# EAGLE board burglar alarm (EAGLE 6.1)
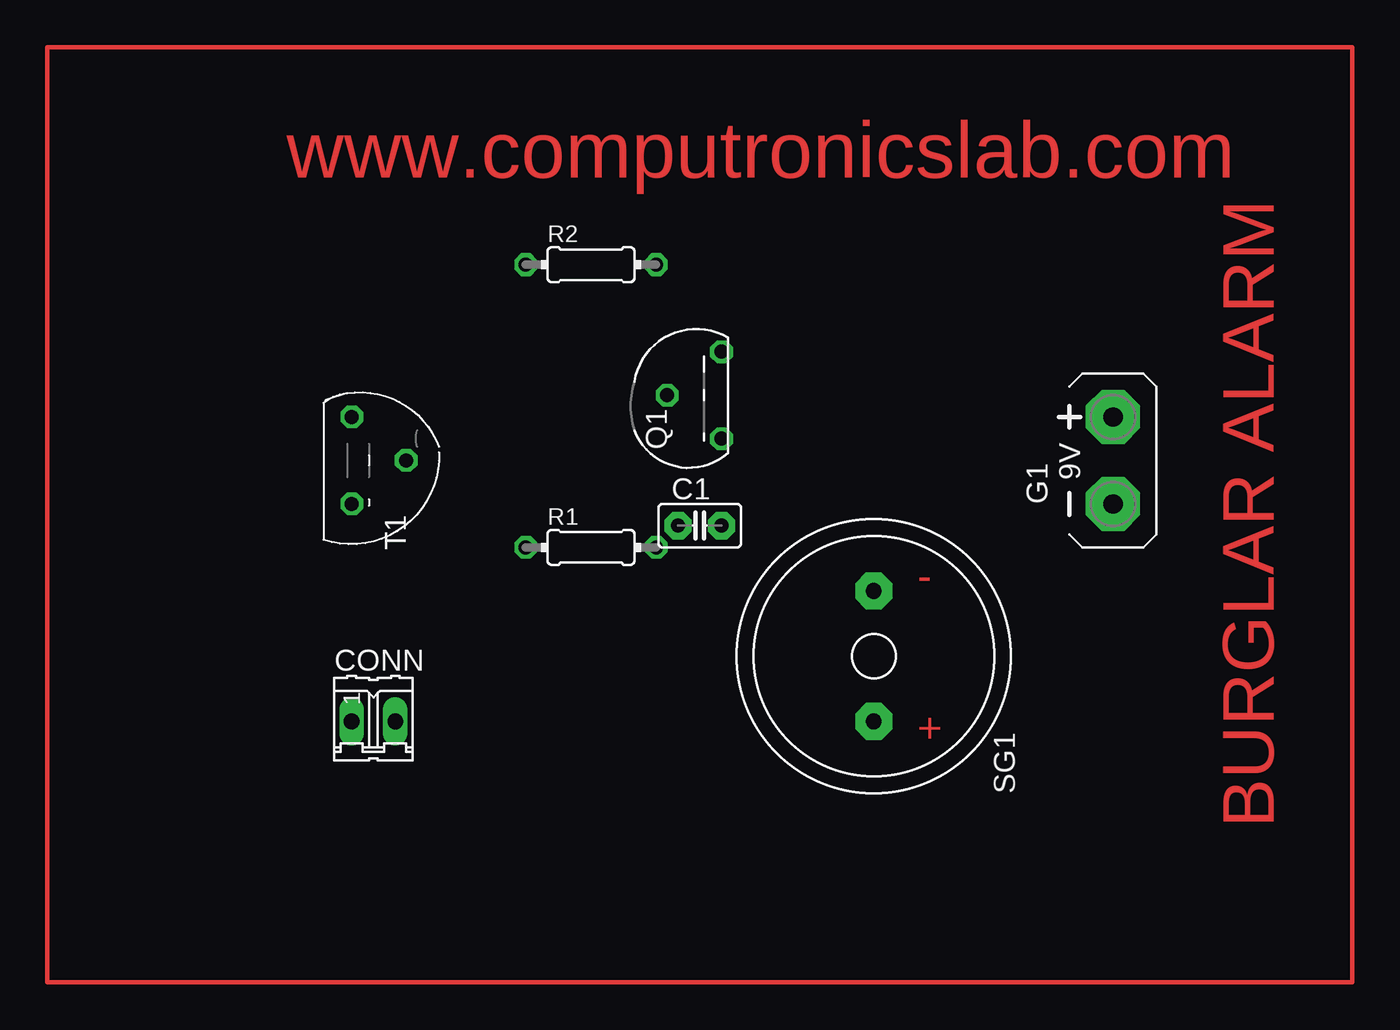
[diagram p0: board, top side]
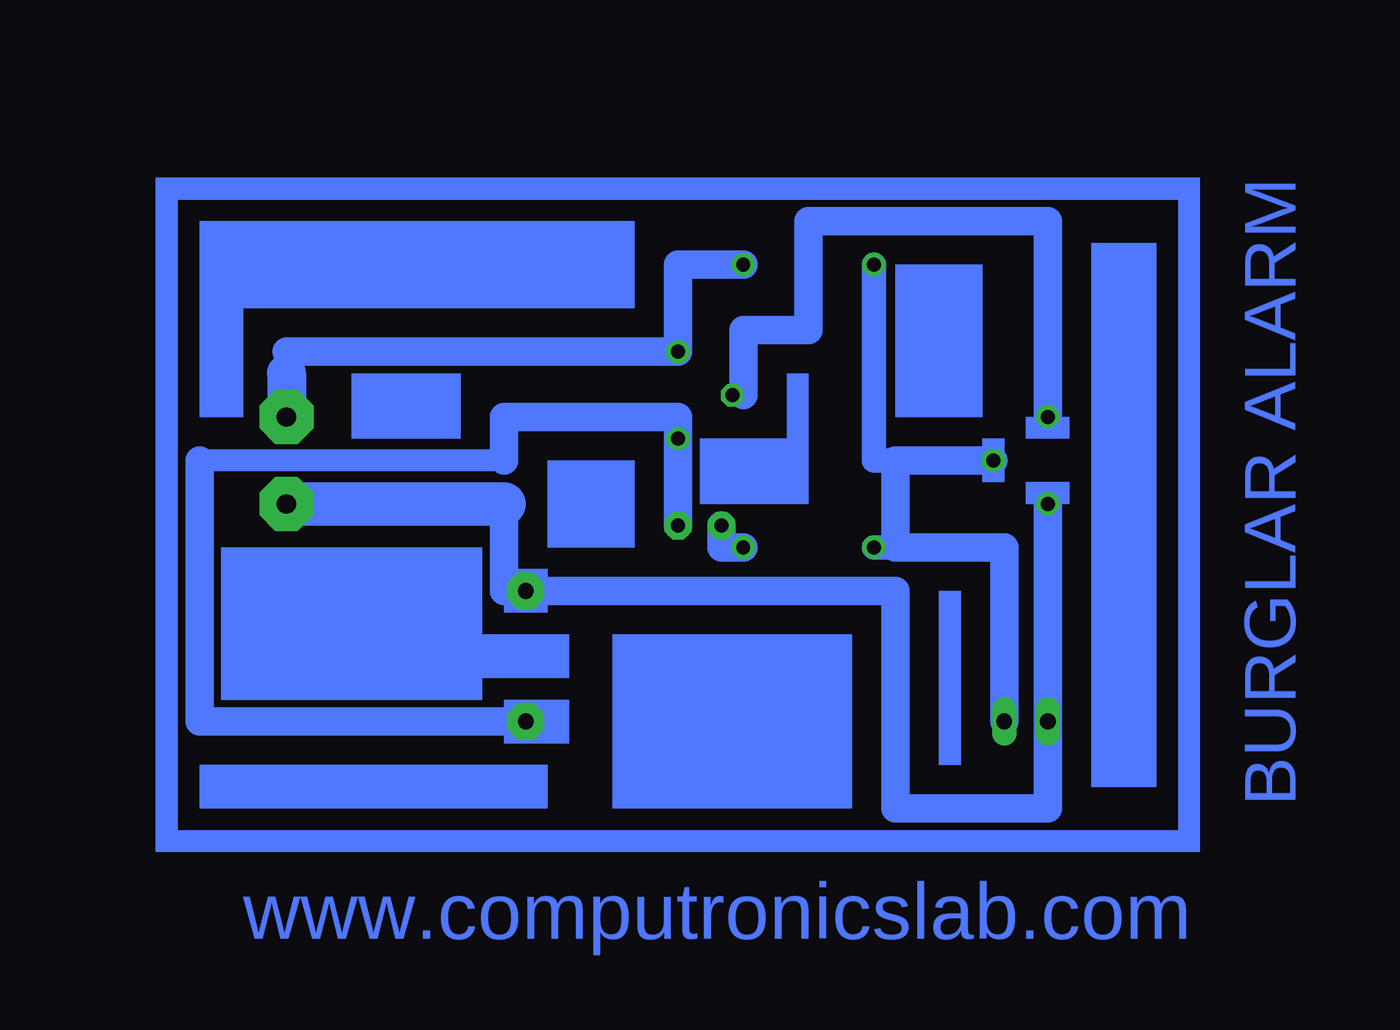
[diagram p1: board, bottom side, seen from below]

No outline drawn. Coordinates in mm, seen from the top.
Copper layers (1*16): Top 0.035mm / dielectric 1.5mm / Bottom 0.035mm
Design rules: minimum track width 10mil, minimum drill 24mil, track to track 8mil, track to pad 8mil, pad to pad 8mil, via to via 8mil, smd to smd 8mil, copper to edge 40mil, drill to drill 8mil, minimum pad ring 10mil, minimum via ring 8mil, stop-mask expansion 4mil, vias tented up to drill 0mil, thermal gap 10mil

## Footprints (pad centres in the part's own frame; a part is rotated, then mirrored left to right if it is on the bottom)
C2.5-2 = drill 0.813 pad 1.6 octagon: 1 -1.27,0; 2 1.27,0
02P = drill 0.914 long: 1 -1.27,0; 2 1.27,0
AB9V = drill 1.118 pad 3.15 octagon: + 0,2.54; - 0,-2.54
TO92 = drill 0.813 octagon: 1 2.54,-1.27; 2 0,1.905; 3 -2.54,-1.27
0204/7 = drill 0.813 octagon: 1 -3.81,0; 2 3.81,0
F/QMB = drill 0.914 pad 2.159 octagon: + 3.81,0; - -3.81,0

## Placement (x,y rotation side)
C1  0.1UF  [C2.5-2]  58.42,45.72 0 top
CONN  2 PIN  [02P]  39.37,34.29 0 top
G1  AB9V  [AB9V]  82.55,49.53 0 top
Q1  BC557  [TO92]  58.42,53.34 90 top
R1  10k  [0204/7]  52.07,44.45 0 top
R2  10k  [0204/7]  52.07,60.96 0 top
SG1  BUZZER  [F/QMB]  68.58,38.1 270 top
T1  BC547  [TO92]  39.37,49.53 270 top

## Library data of the parts
C1 = capacitor-wima
CONN = con-amp-quick; OC_FARNELL: unknown; OC_NEWARK: unknown
G1 = battery
Q1 = transistor-pnp
R1 R2 = rcl
SG1 = buzzer; OC_FARNELL: unknown; OC_NEWARK: unknown
T1 = transistor

## Nets
N$1: C1.2 Q1.3 SG1.+
N$2: C1.1 R1.2
N$3: CONN.1 G1.- SG1.- T1.1
N$4: CONN.2 R1.1 R2.1 T1.2
N$5: G1.+ Q1.1 R2.2
N$6: Q1.2 T1.3

## Tracks (layer width: path | path; a pad name or v marks a point on that pad's centre or on a via)
N$1
  Bottom 1.016: Q1.3 59.69,52.07
  Bottom 1.27: 69.85,49.53 87.63,49.53
  Bottom 1.676: 59.69,48.26 59.69,52.07 69.85,52.07 69.85,49.53 | 87.63,49.53 87.63,34.29 SG1.+ | Q1.3 C1.2
N$2
  Bottom 1.676: C1.1 57.15,44.45 R1.2
N$3
  Bottom 1.016: SG1.- 69.85,41.91
  Bottom 1.676: 69.85,41.91 69.85,46.99 | SG1.- 46.99,41.91 46.99,29.21 38.1,29.21 38.1,30.48 CONN.1 T1.1
  Bottom 2.54: 69.85,46.99 G1.-
N$4
  Bottom 1.422: 46.99,44.45 R1.1 | R2.1 48.26,49.53 46.99,49.53
  Bottom 1.676: T1.2 46.99,49.53 46.99,44.45 40.64,44.45 CONN.2
N$5
  Bottom 1.27: 82.55,54.61 82.55,55.88
  Bottom 1.676: 82.55,55.88 Q1.1 59.69,60.96 58.42,60.96 R2.2
  Bottom 2.286: 82.55,54.61 G1.+
N$6
  Bottom 1.016: 55.88,53.34 Q1.2
  Bottom 1.676: 55.88,53.34 55.88,57.15 52.07,57.15 52.07,63.5 38.1,63.5 T1.3
N$7
  Top 0.254: 20.32,73.66 96.52,73.66 96.52,19.05 20.32,19.05 20.32,73.66
(copper drawn outside any net)
  shapes: Bottom area x29

## Text on the board
Top: www.computronicslab.com | BURGLAR ALARM | - | +
Bottom: BURGLAR ALARM | www.computronicslab.com